# Altium PCB OMAPL-137-Manchester.PcbDoc
Units mm, origin at the board's own origin, x right, y up, seen from the top; angles counter-clockwise.
Board outline 152.4 x 101.6 mm, 2 copper layers (Top Layer, Bottom Layer); 10 components, 39 nets, 95 pads, 0 vias.
Unrouted connection lines stored in the file: 35.
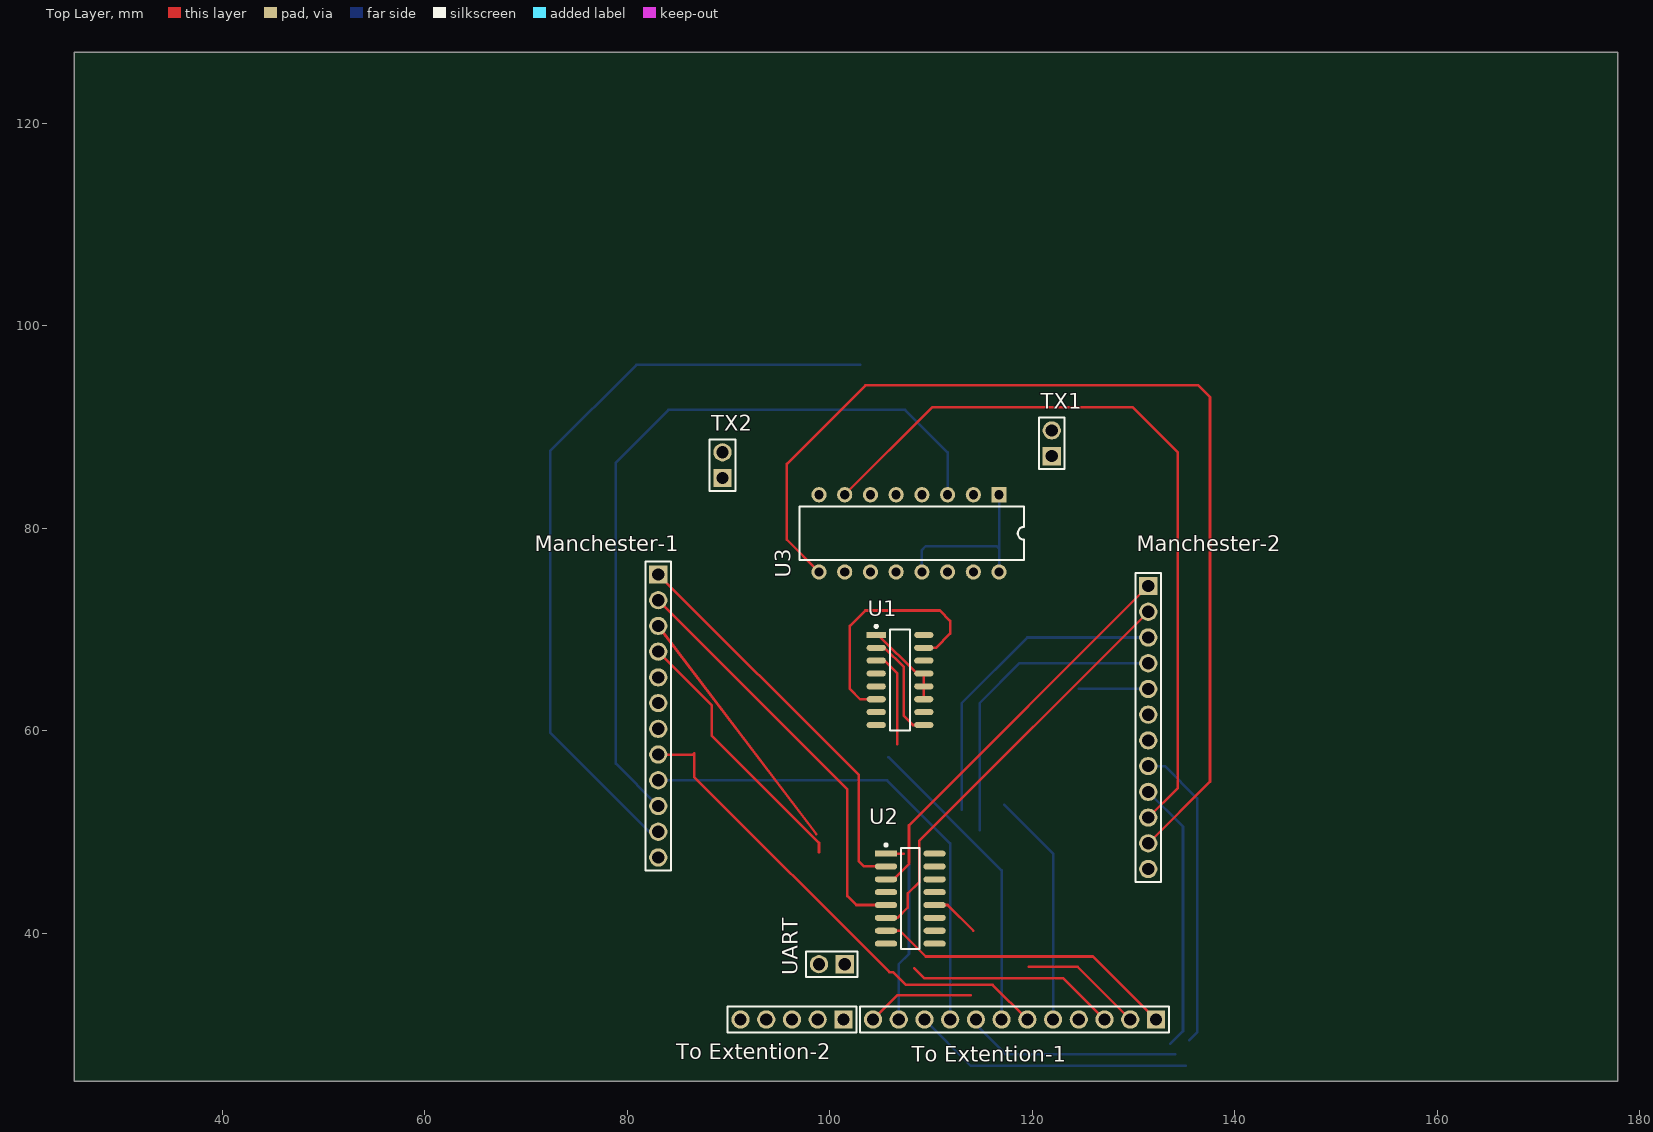
[diagram p0: Top Layer view]
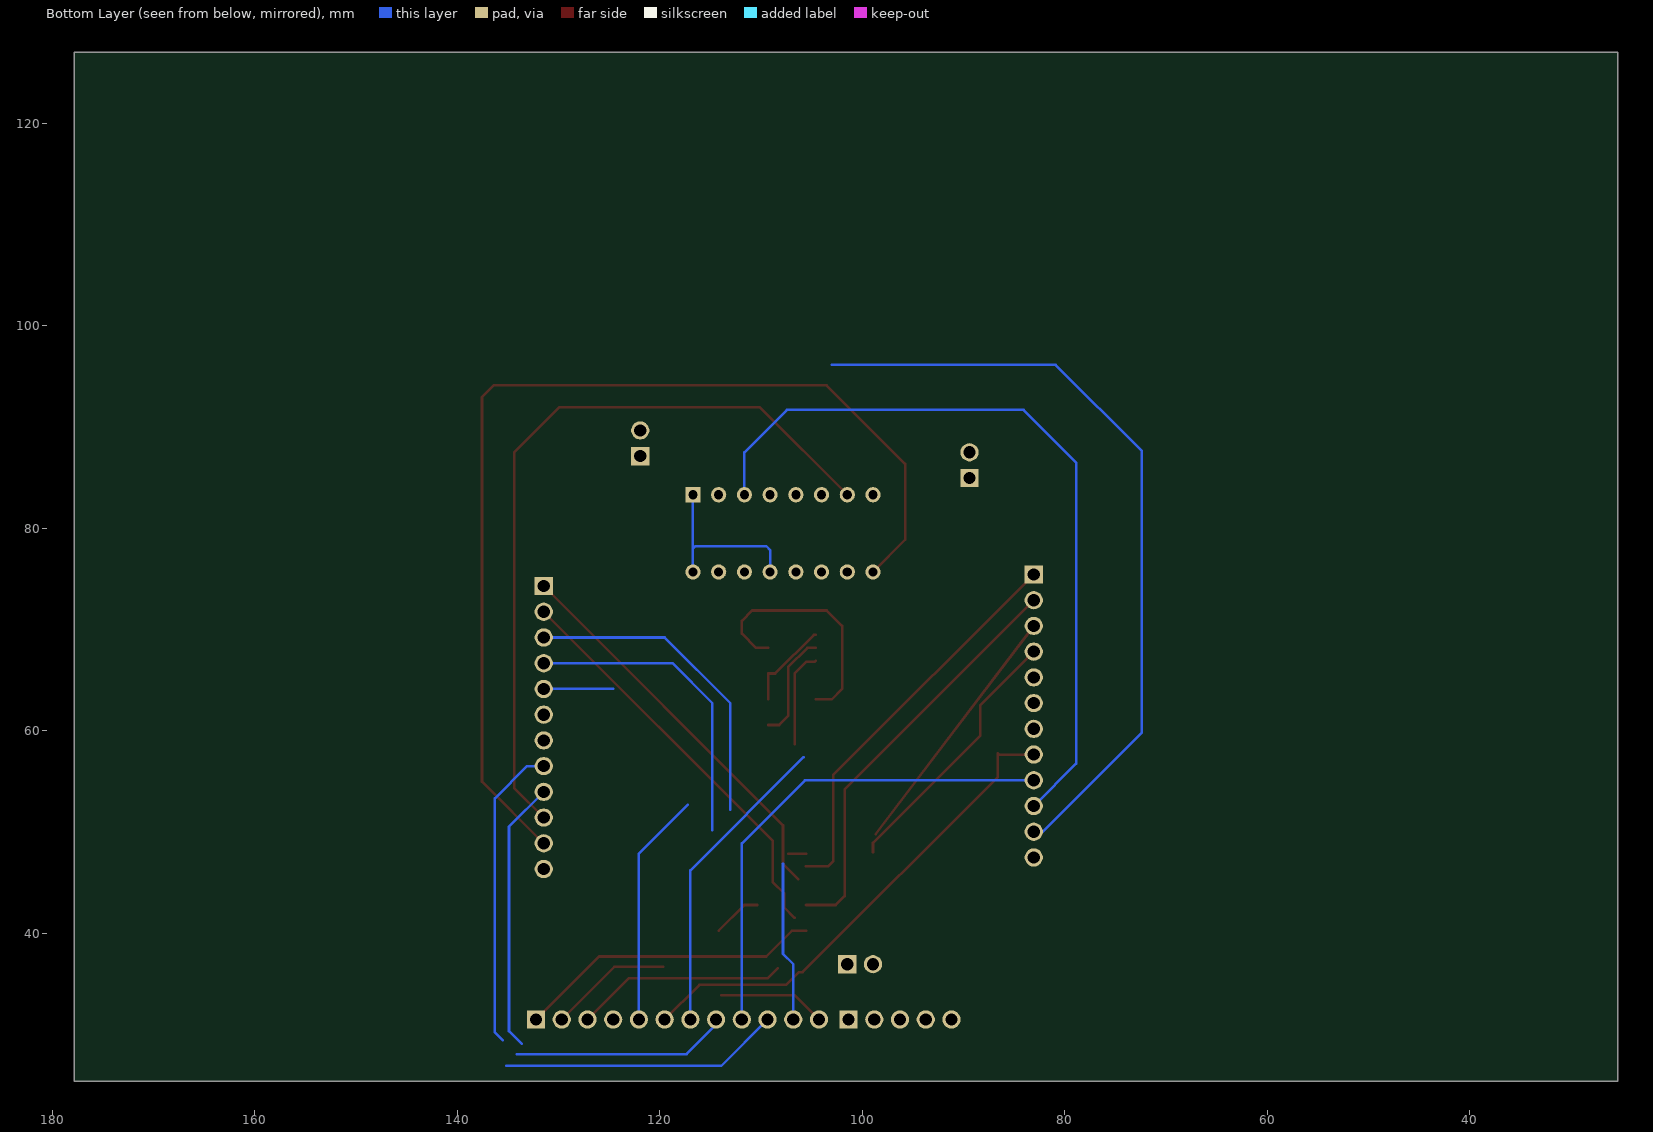
[diagram p1: Bottom Layer view, seen from below]

## Layer stack, top to bottom
Top Solder: solder mask 0.0102, Solder Resist, Dk 3.5
Top Layer: signal copper 0.0356
Dielectric 1: dielectric 0.32, FR-4, Dk 4.8
Bottom Layer: signal copper 0.0356
Bottom Solder: solder mask 0.0102, Solder Resist, Dk 3.5

## Board outline
25.4,25.4 177.8,25.4 177.8,127 25.4,127

## Design rules (kind name [scope] priority, off if disabled: settings)
Clearance Polygons [InPolygon] p1: gap=0.254
Clearance [All] p2: gap=0.15
MinimumSolderMaskSliver [All] p1: minsoldermaskwidth=0.1
PolygonConnect [All] p1: connectstyle=Relief reliefconductorwidth=0.254 reliefentries=4 polygonreliefangle="90 Angle" airgapwidth=0.254
RoomDefinition OMAPL-137-Manchester [InComponentClass('OMAPL-137-Manchester')] p1: confinementstyle=ConfineIn formatcopy=TRUE lockcomponents=FALSE outline 9.017,24.384 262.382,24.384 262.382,171.958 9.017,171.958
RoutingVias [All] p1: holewidth=0.711 width=1.27 viastyle="Through Hole" minholewidth=0 minwidth=0 maxholewidth=0.711 maxwidth=1.27
SilkToSilkClearance [All] p1: silktosilkclearance=0
SilkToSolderMaskClearance [IsPad] p1: minsilkscreentomaskgap=0.1 clearancetoexposedcopper=TRUE
SolderMaskExpansion [All] p1: expansion=0.102
Width [All] p1: maxlimit=4 minlimit=0.254 preferedwidth=0.5
27 further rules are at their usual default settings.

## Classes and differential pairs
component class OMAPL-137-Manchester2: "To Extention-1" "To Extention-2"
component class OMAPL-137-Manchester: Manchester-1 Manchester-2 TX1 TX2 U1 U2 U3 UART

## Components (designator, comment, footprint, x,y, rotation, side; value= is the part's Value field where it differs from the comment)
Manchester-1 "Plug_12_2.54" HDR1X12_2.54 83.058,61.468 r270 top
Manchester-2 "Plug_12_2.54" HDR1X12_2.54 131.445,60.325 r270 top
"To Extention-1" "Plug_12_2.54" HDR1X12_2.54 118.237,31.496 r180 top
"To Extention-2" "Plug_05_2.54" HDR1X5_2.54 96.266,31.496 r180 top
TX1 "Plug_2_90_2.54" HDR1X2 121.92,88.392 r90 top
TX2 "Plug_2_90_2.54" HDR1X2 89.408,86.233 r90 top
U1 "74AC11008N" SO-16_L 106.934,65.024 r0 top
U2 "SN74CBT3257" SOIC16_N 107.95,43.434 r0 top
U3 "CD4504BEE4" DIP-16 107.823,79.502 r180 top
UART "Plug_2_90_2.54" HDR1X2 100.203,36.957 r180 top

## Footprints (in the part's own frame and the unit in brackets; to place one, negate y for a bottom-side part, rotate by r counter-clockwise, add the part's x,y. Pads: shape width x height; smd on the part's side, far side on the other; paste and mask are expansions set on the pad)
DIP-16 [mm] "DIP; 16 Leads; Row Spacing 7.62 mm; Pitch 2.54 mm"
  rect 1.5x1.5 hole 0.9: 1(-8.89,-3.81)
  round 1.5 hole 0.9: 2(-6.35,-3.81) 3(-3.81,-3.81) 4(-1.27,-3.81) 5(1.27,-3.81) 6(3.81,-3.81) 7(6.35,-3.81) 8(8.89,-3.81) 9(8.89,3.81) 10(6.35,3.81) 11(3.81,3.81) 12(1.27,3.81) 13(-1.27,3.81) 14(-3.81,3.81) 15(-6.35,3.81) 16(-8.89,3.81)
  silkscreen extent -11.37,-2.65 10.8,2.65, body extent -11.29,-2.6 10.8,2.7, height 3
HDR1X2 [mm] "Connector; Header; 2 Position"
  rect 1.8x1.8 hole 1.2: 1(-1.27,0)
  round 1.8 hole 1.2: 2(1.27,0)
  silkscreen extent -2.54,-1.27 2.54,1.27, body extent -2.54,-1.27 2.54,1.27, height 8.62
HDR1X5_2.54 [mm] "Connector; Header; 5 Position"
  rect 1.8x1.8 hole 1.2: 1(-5.08,0)
  round 1.8 hole 1.2: 2(-2.54,0) 3(0,0) 4(2.54,0) 5(5.08,0)
  silkscreen extent -6.35,-1.27 6.35,1.27, body extent -6.34,-1.28 6.36,1.26, height 8.62
HDR1X12_2.54 [mm] "Connector; Header; 11 Position"
  rect 1.8x1.8 hole 1.2: 1(-13.97,0)
  round 1.8 hole 1.2: 2(-11.43,0) 3(-8.89,0) 4(-6.35,0) 5(-3.81,0) 6(-1.27,0) 7(1.27,0) 8(3.81,0) 9(6.35,0) 10(8.89,0) 11(11.43,0) 12(13.97,0)
  silkscreen extent -15.24,-1.27 15.24,1.27, body extent -15.21,-1.27 15.27,1.27, height 8.62
SO-16_L [mm] "SOIC, 16-Leads, Body 9.9x3.9mm, Pitch 1.27mm, IPC High Density"
  rect 1.9x0.6 smd: 1(-2.35,4.445)
  oval 1.9x0.6 smd: 2(-2.35,3.175) 3(-2.35,1.905) 4(-2.35,0.635) 5(-2.35,-0.635) 6(-2.35,-1.905) 7(-2.35,-3.175) 8(-2.35,-4.445) 9(2.35,-4.445) 10(2.35,-3.175) 11(2.35,-1.905) 12(2.35,-0.635) 13(2.35,0.635) 14(2.35,1.905) 15(2.35,3.175) 16(2.35,4.445)
  silkscreen extent -2.47,-5 1,5.42, body extent -2,-5 2,5, height 1.75
SOIC16_N [mm] "SOIC, 16-Leads, Body 9.9x3.9mm, Pitch 1.27mm, IPC Medium Density"
  rect 2.2x0.6 smd: 1(-2.4,4.445)
  oval 2.2x0.6 smd: 2(-2.4,3.175) 3(-2.4,1.905) 4(-2.4,0.635) 5(-2.4,-0.635) 6(-2.4,-1.905) 7(-2.4,-3.175) 8(-2.4,-4.445) 9(2.4,-4.445) 10(2.4,-3.175) 11(2.4,-1.905) 12(2.4,-0.635) 13(2.4,0.635) 14(2.4,1.905) 15(2.4,3.175) 16(2.4,4.445)
  silkscreen extent -2.52,-5 0.9,5.42, body extent -3,-5.08 3,5.08, height 1.7

## Part data
Manchester-1 Manchester-2 "To Extention-1": "Plug, 11-Pin"
"To Extention-2": "Plug, 08-Pin"
TX1 TX2 UART: "Plug, 2-Pin"
U1: "Quad AND, TTL"
U2: "LV 4BIT FET MUX/DEMUX"
U3: "20V Level shifter"

## Nets (pads, with @x,y where several pads share a name; then routed paths per layer and width w, separated by ;. In a path a pad name is that pad's centre, name@x,y a point inside that pad or via, vN(x,y) a via of type N, cw(c..) or ccw(c..) an arc to the next point about the centre after c; other vN are vias at no path point)
3.3VCC: "To Extention-2.4" U1.1 U1.11 U1.12 U1.13 U2.16 | length 8.8
  Top Layer w0.254: U1.1 104.78,69.469 108.59,65.659 U1.13 U1.12 U1.11
5VCC: "To Extention-2.3" U3.1 U3.13 U3.16 | length 17.7
  Bottom Layer w0.254: U3.13 109.093,77.851 109.474,78.232 116.459,78.232 116.713,77.978 ; U3.16 116.713,77.978 ; U3.1 116.713,77.978
EXP2_UART1_RXD: "To Extention-2.1" UART.1
EXP2_UART1_TXD: "To Extention-2.2" UART.2
GND: "To Extention-2.5" Manchester-1.12 Manchester-2.12 U1.4 U1.5 U2.8 U2.15 U3.8
NetManchester-1_1: Manchester-1.1 U2.2 | length 39.4
  Top Layer w0.254: Manchester-1.1 102.87,55.626 102.87,47.117 103.378,46.609 U2.2
NetManchester-1_2: Manchester-1.2 U2.5 | length 41.1
  Top Layer w0.254: Manchester-1.2 101.727,54.229 101.727,43.688 102.616,42.799 U2.5
NetManchester-1_3: Manchester-1.3 U2.11 | length 25.8
  Top Layer w0.254: Manchester-1.3 98.679,49.784
NetManchester-1_4: Manchester-1.4 U2.14 | length 26.4
  Top Layer w0.254: Manchester-1.4 88.339,62.537 88.339,59.53 98.933,48.936 98.933,48.006
NetManchester-1_5: "To Extention-1.4" Manchester-1.5 Manchester-2.5 | length 6.9
  Bottom Layer w0.254: 124.587,64.135 Manchester-2.5
NetManchester-1_6: Manchester-1.6 U1.10
NetManchester-1_7: Manchester-1.7 U1.14
NetManchester-1_8: "To Extention-1.6" Manchester-1.8 | length 48.8
  Top Layer w0.254: Manchester-1.8 86.487,57.658 86.614,57.785 86.614,55.436 105.878,36.172 106.259,36.172 107.506,34.925 116.078,34.925 119.507,31.496
NetManchester-1_9: "To Extention-1.9" Manchester-1.9 | length 48.8
  Bottom Layer w0.254: Manchester-1.9 105.664,55.118 111.887,48.895 111.887,31.496
NetManchester-1_10: Manchester-1.10 U3.3 | length 76.5
  Bottom Layer w0.254: Manchester-1.10 78.867,56.769 78.867,86.487 84.074,91.694 107.442,91.694 111.633,87.503 U3.3
NetManchester-1_11: Manchester-1.11 U3.5 | length 76.7
  Bottom Layer w0.254: Manchester-1.11 82.169,50.038 72.39,59.817 72.39,87.63 80.899,96.139 102.997,96.139
NetManchester-2_1: Manchester-2.1 U2.3 | length 39.4
  Top Layer w0.254: U2.3@106.299,45.339 107.823,46.863 107.823,50.673 Manchester-2.1
NetManchester-2_2: Manchester-2.2 U2.6 | length 40.5
  Top Layer w0.254: 106.68,41.529 107.696,42.545 107.696,43.942 108.839,45.085 108.839,49.149 Manchester-2.2
NetManchester-2_3: Manchester-2.3 U2.10 | length 31.6
  Bottom Layer w0.254: 113.03,52.197 113.03,62.738 119.507,69.215 Manchester-2.3
NetManchester-2_4: Manchester-2.4 U2.13 | length 30.8
  Bottom Layer w0.254: 114.808,50.165 114.808,62.738 118.745,66.675 Manchester-2.4
NetManchester-2_6: Manchester-2.6 U1.16
NetManchester-2_7: Manchester-2.7 U1.8
NetManchester-2_8: "To Extention-1.8" Manchester-2.8 | length 51.7
  Bottom Layer w0.254: 114.427,31.496 114.427,30.988 117.348,28.067 134.112,28.067 ; Manchester-2.8 133.096,56.515 136.271,53.34 136.271,30.226 135.509,29.464
NetManchester-2_9: "To Extention-1.10" Manchester-2.9 | length 54.5
  Bottom Layer w0.254: 109.347,31.496 113.919,26.924 135.128,26.924 ; Manchester-2.9 134.874,50.546 134.874,30.353 133.604,29.083
NetManchester-2_10: Manchester-2.10 U3.7 | length 75.6
  Top Layer w0.254: U3.7 110.109,91.948 129.921,91.948 134.366,87.503 134.366,54.356 Manchester-2.10
NetManchester-2_11: Manchester-2.11 U3.9 | length 104
  Top Layer w0.254: U3.9 95.758,78.867 95.758,86.36 103.505,94.107 136.398,94.107 137.541,92.964 137.541,54.991 Manchester-2.11
"NetTo Extention-1_1": "To Extention-1.1" U2.7 | length 30.3
  Top Layer w0.254: U2.7 106.934,40.259 109.474,37.719 125.984,37.719 132.207,31.496
"NetTo Extention-1_2": "To Extention-1.2" U2.9 | length 12.2
  Top Layer w0.254: 119.634,36.703 124.46,36.703 129.667,31.496
"NetTo Extention-1_3": "To Extention-1.3" U2.4 | length 20.9
  Top Layer w0.254: 108.331,36.576 109.347,35.56 123.063,35.56 127.127,31.496
"NetTo Extention-1_5": "To Extention-1.5" U1.3 | length 32.8
  Top Layer w0.254: U1.3 104.711,66.802 105.537,66.802 106.68,65.659 106.68,58.674
  Bottom Layer w0.254: 117.221,52.705 122.047,47.879 122.047,31.496
"NetTo Extention-1_7": "To Extention-1.7" U1.7 | length 30.5
  Bottom Layer w0.254: 105.791,57.404 116.967,46.228 116.967,31.496
"NetTo Extention-1_11": "To Extention-1.11" U2.1 | length 17.6
  Top Layer w0.254: U2.1 107.315,47.879
  Bottom Layer w0.254: 106.807,31.496 106.807,36.957 107.823,37.973 107.823,46.863
"NetTo Extention-1_12": "To Extention-1.12" U2.12 | length 15.5
  Top Layer w0.254: 104.267,31.496 106.68,33.909 113.919,33.909 ; U2.12 111.633,42.799 114.173,40.259
NetTX1_1: TX1.1 U3.2
NetTX1_2: TX1.2 U3.4
NetTX2_1: TX2.1 U3.6
NetTX2_2: TX2.2 U3.10
NetU1_2: U1.2 U1.9 | length 10.7
  Top Layer w0.254: U1.2 105.41,68.199 107.315,66.294 107.315,61.468 108.204,60.579 U1.9
NetU1_6: U1.6 U1.15 | length 24.7
  Top Layer w0.254: U1.6 102.997,63.119 101.981,64.135 101.981,70.358 103.505,71.882 110.871,71.882 111.887,70.866 111.887,69.596 110.49,68.199 U1.15
pads on no net: U3.11 U3.12 U3.14 U3.15